# Altium PCB ARM_PCB.PcbDoc
Units mm, origin at the board's own origin, x right, y up, seen from the top; angles counter-clockwise.
Board outline 83 x 49 mm, 2 copper layers (Top Layer, Bottom Layer); 58 components, 41 nets, 250 pads, 33 vias.
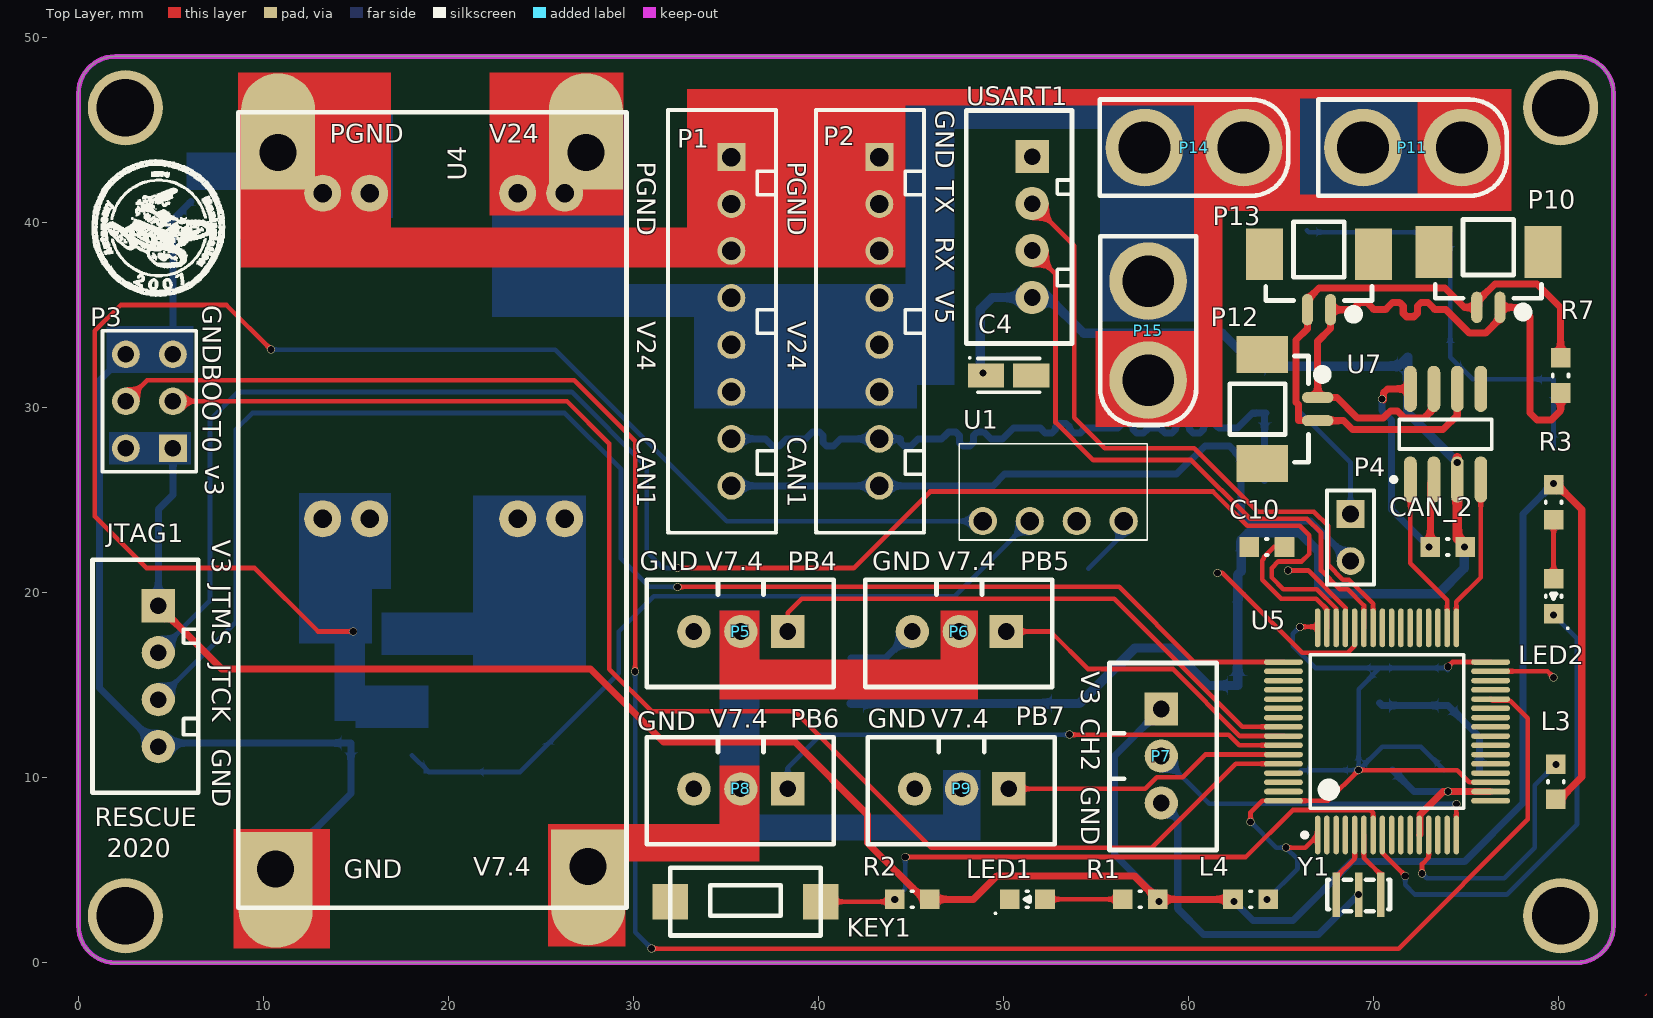
[diagram p0: Top Layer view]
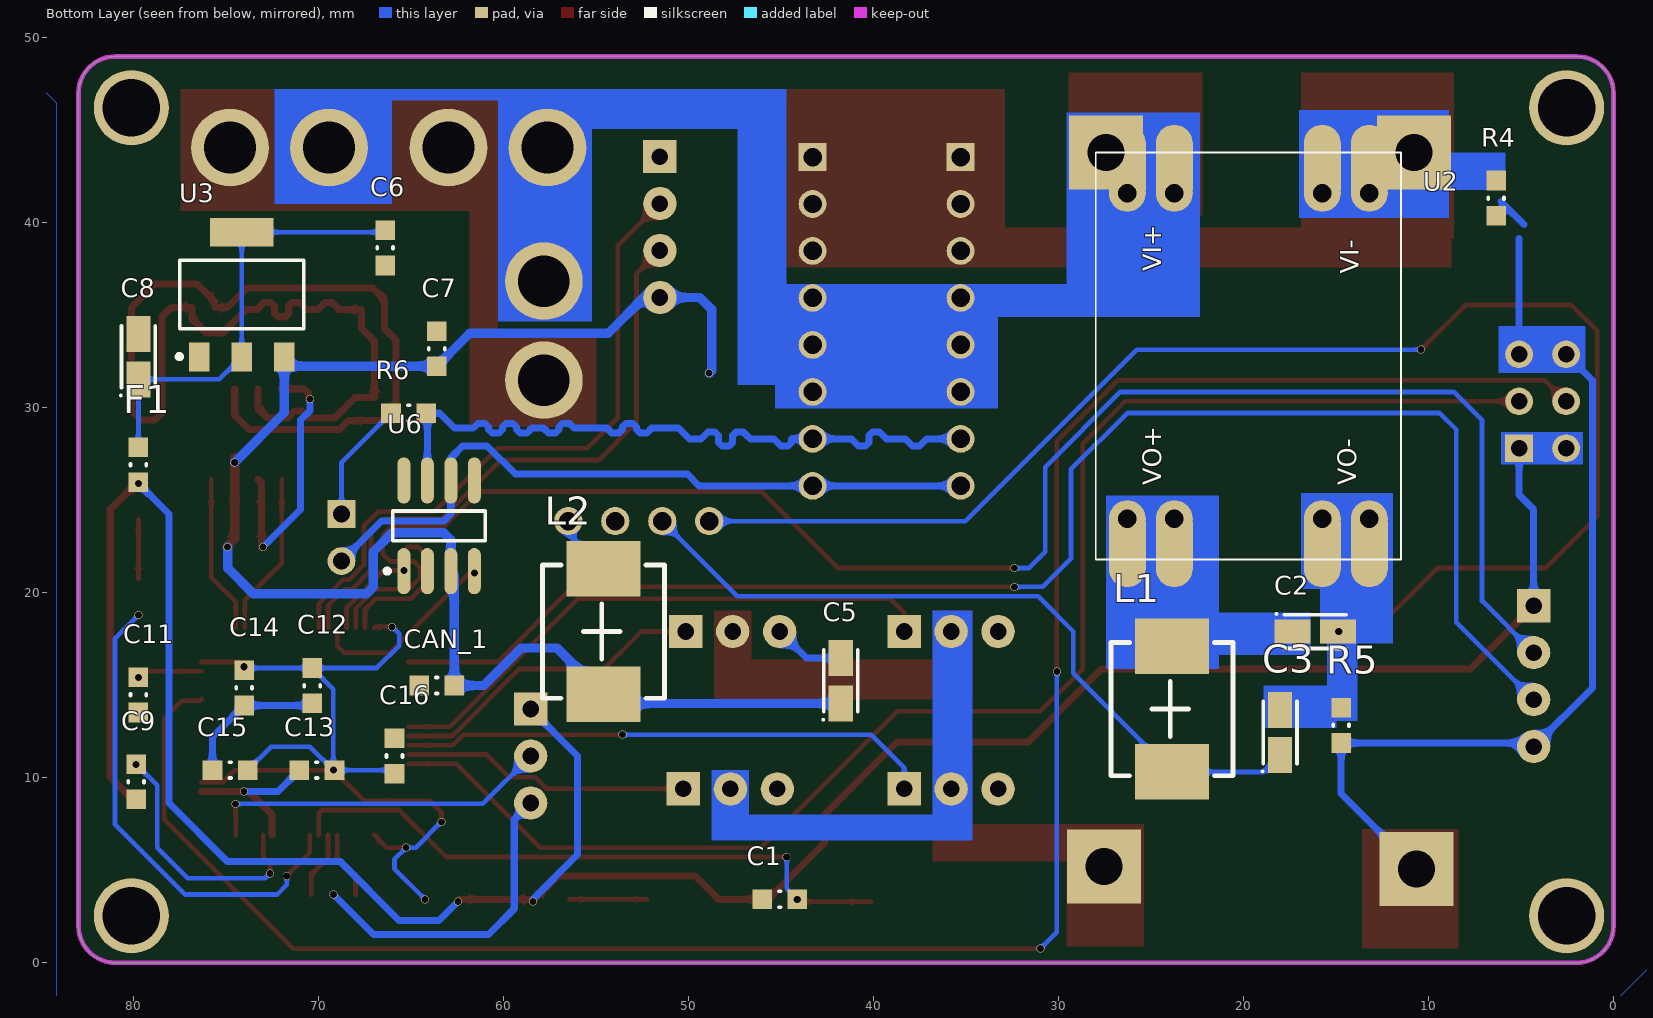
[diagram p1: Bottom Layer view, seen from below]
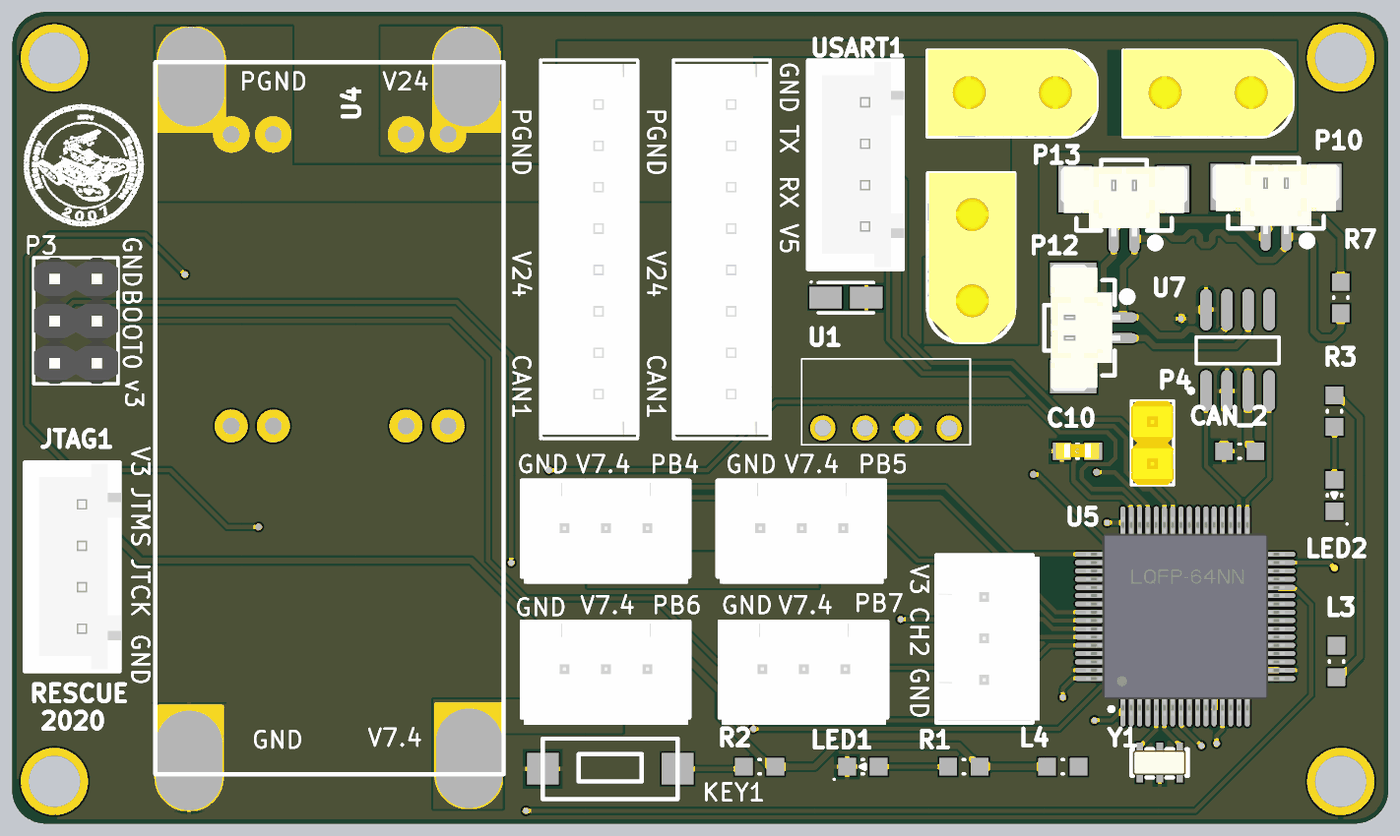
[diagram p2: 3D render of the assembled board from above, using the file's embedded part models]

## Layer stack, top to bottom
Top Solder: solder mask 0.0102, Solder Resist, Dk 3.5
Top Layer: signal copper 0.0356
Dielectric 1: dielectric 0.32, FR-4, Dk 4.8
Bottom Layer: signal copper 0.0356
Bottom Solder: solder mask 0.0102, Solder Resist, Dk 3.5

## Board outline
2,0 cw(c2,2) 0,2 0,47 cw(c2,47) 2,49 81,49 cw(c81,47) 83,47 83,2 cw(c81,2) 81,0

## Design rules (kind name [scope] priority, off if disabled: settings)
Clearance [All] p1: gap=0.127 ignorepadtopadclearanceinfootprint=TRUE
ComponentClearance [All] p1 off: gap=0.254 collisioncheckmode=3 verticalgap=0.254 showdistances=FALSE
DiffPairsRouting [All] p1: maxlimit=0.254 minlimit=0.254 mostfreqgap=0.254 toplayer_minwidth=0.381 toplayer_maxwidth=0.381 toplayer_prefwidth=0.381 bottomlayer_minwidth=0.381 bottomlayer_maxwidth=0.381 bottomlayer_prefwidth=0.381 maxuncoupledlength=12.7
Height [All] p1 off: minheight=0 maxheight=25.4 prefheight=12.7
HoleSize [All] p1 off: absolutevalues=TRUE maxlimit=2.54 minlimit=0.025 maxpercent=80.000 minpercent=20.000
MinimumSolderMaskSliver [All] p1 off: minsoldermaskwidth=0.254
PolygonConnect [All] p1: connectstyle=Relief reliefconductorwidth=0.254 reliefentries=4 polygonreliefangle="90 Angle" airgapwidth=0.254
RoutingVias [All] p1: holewidth=0.711 width=1.27 viastyle="Through Hole" minholewidth=0.711 minwidth=1.27 maxholewidth=0.711 maxwidth=1.27
SilkToSilkClearance [All] p1 off: silktosilkclearance=0.254
SilkToSolderMaskClearance [IsPad] p1 off: minsilkscreentomaskgap=0.254 clearancetoexposedcopper=TRUE
SolderMaskExpansion [All] p1: expansion=0.102
Width VCC_5 [InNet('VCC_5')] p1: maxlimit=0.762 minlimit=0.381 preferedwidth=0.762
Width PGND [InNet('PGND')] p2: maxlimit=1.27 minlimit=0.762 preferedwidth=1.27
Width GND [InNet('GND')] p3: maxlimit=0.762 minlimit=0.254 preferedwidth=0.762
Width CGND [InNet('CGND')] p4: maxlimit=0.762 minlimit=0.254 preferedwidth=0.762
Width VCC_24 [InNet('VCC_24')] p5: maxlimit=1.27 minlimit=0.889 preferedwidth=1.27
Width VCC_7.4 [InNet('VCC_7.4')] p6: maxlimit=0.762 minlimit=0.508 preferedwidth=0.762
Width VCC_3.3 [InNet('VCC_3.3')] p7: maxlimit=0.381 minlimit=0.381 preferedwidth=0.381
Width [All] p8: maxlimit=0.254 minlimit=0.254 preferedwidth=0.254
23 further rules are at their usual default settings.

## Classes and differential pairs
differential pair CAN2: +CAN2_P -CAN2_N
differential pair CAN1: +CAN1_P -CAN1_N

## Components (designator, comment, footprint, x,y, rotation, side; value= is the part's Value field where it differs from the comment)
C1 "104" C0603 45.085,3.429 r0 bottom
C2 "4.7uF" A3216 16.129,17.907 r180 bottom
C3 "4.7uF" A3216 18.034,12.446 r90 bottom
C4 "10uF" A3216 50.292,31.75 r0 top
C5 "22uF" A3216 41.783,15.24 r90 bottom
C6 "104" C0603 66.421,38.646 r270 bottom
C7 "104" C0603 63.627,33.199 r270 bottom
C8 "22uF" A3216 79.756,32.766 r90 bottom
C9 "104" C0603/1608 79.883,9.779 r270 bottom
C10 "225" C0603/1608 64.255,22.479 r0 top
C11 "225" C0603/1608 79.756,14.478 r90 bottom
C12 "104" C0603/1608 70.358,14.986 r90 bottom
C13 "104" C0603/1608 70.104,10.414 r180 bottom
C14 "104" C0603/1608 74.041,14.859 r90 bottom
C15 "104" C0603/1608 74.803,10.414 r180 bottom
C16 "104" C0603/1608 65.913,11.176 r270 bottom
CAN_1 "104" C0603 63.627,14.986 r180 bottom
CAN_2 "104" C0603 74.041,22.479 r0 top
F1 "0.5A" L0603 79.756,26.924 r270 bottom
JTAG1 "Header 4" Header1*4_XH2.54_zhi 3.302,6.35 r90 top
KEY1 "KEY2" KEY_RESET 35.941,3.429 r0 top
L1 "6.8uH" L0630 23.876,13.716 r90 bottom
L2 "6.8uH" L0630 54.61,17.907 r90 bottom
L3 "UPZ1608E101" L0603/1608 79.883,9.779 r90 top
L4 "UPZ1608E101" L0603/1608 63.373,3.429 r0 top
LED1 "LED BLUE" LED0603 51.308,3.429 r180 top
LED2 "LED RED" LED0603 79.756,19.812 r270 top
P1 "Header 8" Header1*8_XH2.54_zhi 38.1,40.259 r0 top
P2 "Header 8" Header1*8_XH2.54_zhi 46.101,40.259 r0 top
P3 "Header 3X2" BOOT 8.917,25.146 r180 top
P4 "Header 2" TM 68.906,23.495 r0 top
P5 "Header 3H" Header1*3XH2.54 35.306,13.843 r180 top
P6 "Header 3H" Header1*3XH2.54 47.117,13.843 r180 top
P7 "Header 3H" Header1*3XH2.54 62.611,10.668 r270 top
P8 "Header 3H" Header1*3XH2.54 35.306,5.334 r180 top
P9 "Header 3H" Header1*3XH2.54 47.244,5.334 r180 top
P10 "CAN-GH1.25-2P" GH1.25-2P（立式） 76.854,35.433 r0 top
P11 "Header 2" XT30_ĸ 73.898,52.07 r0 top
P12 "CAN-GH1.25-2P" GH1.25-2P（立式） 67.002,30.558 r90 top
P13 "CAN-GH1.25-2P" GH1.25-2P（立式） 67.691,35.306 r0 top
P14 "Header 2" XT30_ĸ 62.087,52.07 r0 top
P15 "Header 2" XT30_ĸ 65.84,32.401 r270 top
R1 "4.7K" R0603 57.404,3.429 r180 top
R2 "10kΩ" R0603 45.085,3.429 r0 top
R3 "4K7" R0603 79.756,24.892 r90 top
R4 "0R" R0603 6.35,41.341 r270 bottom
R5 "0R" R0603 14.732,12.827 r270 bottom
R6 "R_120" R0603 65.151,29.718 r0 bottom
R7 "R_120" R0603 80.137,31.75 r90 top
U1 "金升阳" 金升阳 52.705,23.876 r0 top
U2 "降压DM02" 降压DM02 17.59,47.027 r270 bottom
U3 "1117_WYN" SOT-223 74.168,36.122 r180 bottom
U4 "LM2596" LM2586_new 8.636,45.974 r270 top
U5 "STM32F405RGT6" LQFP64 70.751,12.506 r90 top
U6 "TJA1050" SO8_M 63.5,23.622 r90 bottom
U7 "TJA1050" SO8_M 73.914,28.575 r90 top
USART1 "Header 4" Header1*4_XH2.54_zhi 50.546,30.63 r90 top
Y1 "Crystal_Cap" XTAL-3213 69.215,3.683 r0 top

## Footprints (in the part's own frame and the unit in brackets; to place one, negate y for a bottom-side part, rotate by r counter-clockwise, add the part's x,y. Pads: shape width x height; smd on the part's side, far side on the other; paste and mask are expansions set on the pad)
A3216 [mm]
  rect 1.95x1.3 smd: 1(-1.225,0) 2(1.225,0)
  silkscreen extent -2.15,-0.91 1.68,1, body extent -1.7,-0.9 1.7,0.9, height 1.8
BOOT [mm]
  rect 1.5x1.5 hole 0.9: 1(3.81,-2.667)
  round 1.5 hole 0.9: 2(6.35,-2.667) 3(3.81,-5.207) 4(6.35,-5.207) 5(3.81,-7.747) 6(6.35,-7.747)
  silkscreen extent 2.54,-9.02 7.62,-1.4, body extent 2.54,-9.02 7.62,-1.4, height 8.38
C0603 [mm]
  rect 1.06x1.06 smd: 1(-0.95,0) 2(0.95,0)
  silkscreen extent -0.05,-0.43 0.05,0.43, body extent -0.85,-0.48 0.85,0.47, height 0.95
C0603/1608 [mm]
  rect 1.06x1.06 smd: 1(-0.95,0) 2(0.95,0)
  silkscreen extent -0.05,-0.43 0.05,0.43, body extent -1.29,-0.48 1.31,0.53, height 0.95
GH1.25-2P（立式） [mm]
  rect 2x2.8 smd: 0(-3.575,3) 0(2.325,3)
  oval 0.6x1.7 smd: 1(0,0) 2(-1.25,0)
  silkscreen extent -3.5,-0.5 2.25,4.75, body extent -4.45,0.15 3.2,4.35, height 4.7
Header1*3XH2.54 [mm]
  rect 1.8x1.8 hole 0.9: 1(-3.048,-4.064)
  round 1.8 hole 0.9: 2(-0.508,-4.064) 3(2.032,-4.064)
  silkscreen extent -5.54,-6.86 4.57,-1.06, body extent -5.46,-6.73 4.44,-0.64, height 7
Header1*4_XH2.54_zhi [mm]
  rect 1.8x1.8 hole 0.9: 1(12.954,-1.016)
  round 1.8 hole 0.9: 2(10.414,-1.016) 3(7.874,-1.016) 4(5.334,-1.016)
  silkscreen extent 2.84,-3.17 15.44,2.54, body extent 2.97,-3.26 15.37,2.49, height 7
Header1*8_XH2.54_zhi [mm]
  rect 1.5x1.5 hole 1: 1(-2.794,3.302)
  round 1.5 hole 1: 2(-2.794,0.762) 3(-2.794,-1.778) 4(-2.794,-4.318) 5(-2.794,-6.858) 6(-2.794,-9.398) 7(-2.794,-11.938) 8(-2.794,-14.478)
  silkscreen extent -6.22,-17.02 -0.38,5.84, body extent -6.13,-16.79 -0.38,5.61, height 7
KEY_RESET [mil]
  rect 75x75 smd: 1(-155,-5) 2(165,-5)
  silkscreen extent -155,-77 165,67, body extent -175,-75 185,65, height 98
L0603 [mm]
  rect 1.06x1.06 smd: 1(-0.95,0) 2(0.95,0)
  silkscreen extent -0.05,-0.43 0.05,0.43, body extent -0.85,-0.48 0.85,0.47, height 0.95
L0603/1608 [mm]
  rect 1.06x1.06 smd: 1(-0.95,0) 2(0.95,0)
  silkscreen extent -0.05,-0.43 0.05,0.43, body extent -0.9,-0.5 0.9,0.5, height 1
L0630 [mm]
  rect 3x4 smd: 1(-3.4,0) 2(3.4,0)
  silkscreen extent -3.6,-3.3 3.6,3.3, body extent -3.6,-3.3 3.6,3.3, height 3
LED0603 [mm]
  rect 1.06x1.06 smd: 1(-0.95,0) 2(0.95,0)
  silkscreen extent -0.13,-0.43 1.78,0.81, body extent -0.85,-0.48 0.85,0.47, height 0.95
LM2586_new [mm]
  oval 6x4 smd: 1(0.889,18.796) 2(0.889,2.159) 3(42.037,18.923) 4(42.164,2.032)
  rect 4x4 hole 2: 1(2.159,18.796) 2(2.159,2.159) 3(40.767,18.923) 4(40.894,2.032)
  silkscreen extent 0,0 43,21, body extent 0,0 42.8,20.96, height 1.6
LQFP64 [mm]
  oval 2.1x0.3 smd: 1(-5.6,3.75) 2(-5.6,3.25) 3(-5.6,2.75) 4(-5.6,2.25) 5(-5.6,1.75) 6(-5.6,1.25) 7(-5.6,0.75) 8(-5.6,0.25) 9(-5.6,-0.25) 10(-5.6,-0.75) 11(-5.6,-1.25) 12(-5.6,-1.75) 13(-5.6,-2.25) 14(-5.6,-2.75) 15(-5.6,-3.25) 16(-5.6,-3.75) 33(5.6,-3.75) 34(5.6,-3.25) 35(5.6,-2.75) 36(5.6,-2.25) 37(5.6,-1.75) 38(5.6,-1.25) 39(5.6,-0.75) 40(5.6,-0.25) 41(5.6,0.25) 42(5.6,0.75) 43(5.6,1.25) 44(5.6,1.75) 45(5.6,2.25) 46(5.6,2.75) 47(5.6,3.25) 48(5.6,3.75)
  oval 0.3x2.1 smd: 17(-3.75,-5.6) 18(-3.25,-5.6) 19(-2.75,-5.6) 20(-2.25,-5.6) 21(-1.75,-5.6) 22(-1.25,-5.6) 23(-0.75,-5.6) 24(-0.25,-5.6) 25(0.25,-5.6) 26(0.75,-5.6) 27(1.25,-5.6) 28(1.75,-5.6) 29(2.25,-5.6) 30(2.75,-5.6) 31(3.25,-5.6) 32(3.75,-5.6) 49(3.75,5.6) 50(3.25,5.6) 51(2.75,5.6) 52(2.25,5.6) 53(1.75,5.6) 54(1.25,5.6) 55(0.75,5.6) 56(0.25,5.6) 57(-0.25,5.6) 58(-0.75,5.6) 59(-1.25,5.6) 60(-1.75,5.6) 61(-2.25,5.6) 62(-2.75,5.6) 63(-3.25,5.6) 64(-3.75,5.6)
  silkscreen extent -5.72,-4.15 4.15,4.57, body extent -6,-6 6,6, height 1.6
R0603 [mm]
  rect 1.06x1.06 smd: 1(-0.95,0) 2(0.95,0)
  silkscreen extent -0.05,-0.43 0.05,0.43, body extent -0.85,-0.48 0.85,0.47, height 0.95
SO8_M [mm]
  oval 2.5x0.7 smd: 1(-2.45,1.905) 2(-2.45,0.635) 3(-2.45,-0.635) 4(-2.45,-1.905) 5(2.45,-1.905) 6(2.45,-0.635) 7(2.45,0.635) 8(2.45,1.905)
  silkscreen extent -2.57,-2.5 0.8,2.93, body extent -2,-2.5 2,2.5, height 1.75
SOT-223 [mm]
  rect 1.1x1.55 smd: 1(-2.3,-3.375) 2(0,-3.375) 3(2.3,-3.375)
  rect 3.45x1.55 smd: 4(0,3.375)
  silkscreen extent -3.5,-3.48 3.35,1.85, body extent -3.3,-3.94 3.3,3.43, height 0.8
TM [mm]
  rect 1.5x1.5 hole 0.9: 1(-0.127,0.762)
  round 1.5 hole 0.9: 2(-0.127,-1.778)
  silkscreen extent -1.4,-3.05 1.14,2.03, body extent -1.4,-3.05 1.14,2.03, height 9.5
XT30_ĸ [mm]
  round 4.2 hole 2.8: 1(-4.445,-8.001) 2(0.905,-8.001)
  silkscreen extent -6.87,-10.6 3.33,-5.4, body extent -6.96,-10.63 3.44,-5.33, height 12.6
XTAL-3213 [mm]
  rect 0.4x2.4 smd: 1(-1.2,0) 2(0,0) 3(1.2,0)
  silkscreen extent -1.7,-0.9 1.7,0.8, body extent -1.63,-0.76 1.57,0.74, height 0.8
金升阳 [mil]
  round 60 hole 39.37: 1(-150,0) 2(-50,0) 3(50,0) 4(150,0)
  silkscreen extent -200,-40 200,165
降压DM02 [mm]
  oval 4.5x2 smd: 1(3.974,-8.699) 1(3.974,-6.159) 2(3.974,1.841) 2(3.974,4.381) 3(24.474,-8.699) 3(24.474,-6.159) 4(24.474,1.841) 4(24.474,4.381)
  round 2 hole 1: 1(5.424,-8.699) 1(5.424,-6.159) 2(5.424,1.841) 2(5.424,4.381) 3(23.024,-8.699) 3(23.024,-6.159) 4(23.024,1.841) 4(23.024,4.381)
  silkscreen extent 3.22,-10.41 25.22,6.09, body extent 3.3,-10.29 25.15,6.1, height 4.5

## Part data
C1 C6 CAN_1 CAN_2: library part CAP_WYN
C2 C3 C4 C5 C8: library part CAP_POL_WYN
C7: library part Cap
C9 C10 C11 C12 C13 C14 C15 C16: library part 陶瓷电容, "陶瓷电容"
F1: library part FUSE
JTAG1 USART1: "Header, 4-Pin", LatestRevisionDate=17-Jul-2002, LatestRevisionNote="Re-released for DXP Platform.", Publisher="Altium Limited"
KEY1: library part KEY
L1 L2 L3 L4: library part 磁珠, "贴片磁珠"
LED1: library part LED, Color=BLUE
LED2: library part LED, Color=RED
P1 P2: "Header, 8-Pin", LatestRevisionDate=17-Jul-2002, LatestRevisionNote="Re-released for DXP Platform.", Publisher="Altium Limited"
P3: "Header, 3-Pin, Dual row", LatestRevisionDate=17-Jul-2002, LatestRevisionNote="Re-released for DXP Platform.", Publisher="Altium Limited"
P10 P12 P13: "CAN-GH1.25-2P端子座"
R1 R6 R7: library part R
R2: library part RES_WYN
R3 R4 R5: library part Resistor
U4: library part DC-DC稳压模块, "云辉 LM2596S DC-DC降压电源模块"
U5: "微控制器STM32F405RGT6"
Y1: LatestRevisionDate=17-Jul-2002, LatestRevisionNote="Re-released for DXP Platform.", Published=8-Jun-2000, Publisher="Altium Limited"

## Free pads (board coordinates)
  round 4.064 hole 3.1: 1(2.54,46.228) 2(2.54,2.54) 3(80.137,2.54) 4(80.137,46.228)

## Via types
v1: diameter 0.432, hole 0.381, Top Layer to Bottom Layer, 33 vias

## Nets (pads, with @x,y where several pads share a name; then routed paths per layer and width w, separated by ;. In a path a pad name is that pad's centre, name@x,y a point inside that pad or via, vN(x,y) a via of type N, cw(c..) or ccw(c..) an arc to the next point about the centre after c; other vN are vias at no path point)
ADC_CH2: P7.2 U5.16 | length 18.7
  Top Layer w0.254: U5.16 v1(74.501,8.588)
  Bottom Layer w0.254: P7.2 61.135,8.588 v1(74.501,8.588)
BOOT0: P3.3 U5.60 | length 79.1
  Top Layer w0.254: P3.3 26.416,30.353 28.702,28.067 28.702,15.875 30.988,13.589 38.735,13.589 46.101,6.223 58.039,6.223 62.572,10.756 U5.60
BOOT1: P3.4 U5.28 | length 115.3
  Top Layer w0.254: P3.4 3.71,31.496 26.797,31.496 30.099,28.194 v1(30.099,15.748) ; v1(30.988,0.762) 71.374,0.762 78.359,7.747 78.359,13.219 77.418,14.16 76.447,14.16 U5.28
  Bottom Layer w0.254: v1(30.099,15.748) 30.099,1.651 v1(30.988,0.762)
CAN1_N: P1.8 P2.8 P4.2 U6.6 | length 38.7
  Bottom Layer w0.381: P1.8 P2.8 49.44,25.781 50.075,26.416 59.377,26.416 60.901,27.94 62.23,27.94 62.865,27.305 U6.6 62.865,24.257 63.246,23.876 66.62,23.876 P4.2
CAN1_P: P1.7 P2.7 R6.1 U6.7 | length 38.5
  Bottom Layer w0.381: P1.7 35.941,28.321 37.148,28.321 37.338,28.13 37.529,27.94 37.91,27.94 38.1,28.13 38.291,28.321 38.481,28.321 39.306,28.321 39.497,28.511 39.688,28.702 40.069,28.702 40.259,28.511 40.259,28.321 40.259,28.13 40.45,27.94 40.831,27.94 41.021,28.13 41.212,28.321 41.402,28.321 P2.7 44.45,28.321 44.45,28.13 44.64,27.94 45.021,27.94 45.212,28.13 45.402,28.321 45.593,28.321 46.482,28.321 46.672,28.321 46.863,28.511 47.053,28.702 47.434,28.702 47.625,28.511 47.625,28.321 47.625,28.13 47.816,27.94 48.197,27.94 48.387,28.13 48.387,28.321 48.387,28.511 48.578,28.702 48.959,28.702 49.149,28.511 49.34,28.321 49.53,28.321 49.967,28.321 50.55,28.904 51.689,28.904 52.006,28.904 52.07,28.84 52.261,28.65 52.642,28.65 52.832,28.84 52.832,28.904 52.832,28.967 53.023,29.158 53.404,29.158 53.594,28.967 53.594,28.904 53.594,28.84 53.785,28.65 54.165,28.65 54.356,28.84 54.419,28.904 54.737,28.904 55.88,28.904 56.197,28.904 56.261,28.967 56.451,29.158 56.832,29.158 57.023,28.967 57.023,28.904 57.023,28.84 57.213,28.65 57.594,28.65 57.785,28.84 57.848,28.904 58.483,28.904 58.547,28.84 58.737,28.65 59.118,28.65 59.309,28.84 59.309,28.904 59.309,28.967 59.499,29.158 59.88,29.158 60.071,28.967 60.071,28.904 60.071,28.84 60.261,28.65 60.642,28.65 60.833,28.84 60.833,28.904 60.833,28.967 61.023,29.158 61.404,29.158 61.595,28.967 61.658,28.904 61.722,28.904 62.666,28.904 63.481,29.718 R6.1 64.135,29.652 U6.7
CAN1_RX: U5.44 U6.4 | length 10.3
  Top Layer w0.254: v1(61.595,21.082) 61.849,21.082 66.167,16.764 68.63,16.764 69.001,17.135 U5.44
CAN1_TX: U5.45 U6.1 | length 5
  Top Layer w0.254: v1(65.405,21.209) 66.483,21.209 68.501,19.191 U5.45
CAN2_N: P10.2 P12.2 P13.2 R7.2 U7.6 | length 35.7
  Top Layer w0.381: U7.6 74.549,29.585 73.787,28.823 68.88,28.823 68.395,29.308 P12.2 65.962,29.308 65.962,30.175 65.835,30.302 65.835,33.659 66.441,34.266 P13.2 66.441,35.834 67.081,36.474 73.889,36.474 74.93,35.433 P10.2 75.604,35.726 76.581,36.703 78.867,36.703 80.137,35.433 R7.2
CAN2_P: P10.1 P12.1 P13.1 R7.1 U7.7 | length 35.7
  Top Layer w0.381: U7.7 73.279,29.972 72.765,29.458 72.39,29.458 72.263,29.458 71.691,29.458 71.501,29.648 71.31,29.839 70.929,29.839 70.739,29.648 70.549,29.458 70.358,29.458 69.143,29.458 68.043,30.558 P12.1 67.002,33.601 67.691,34.29 P13.1 68.707,35.306 68.897,35.306 69.088,35.496 69.278,35.687 69.659,35.687 69.85,35.496 70.04,35.306 70.485,35.306 70.675,35.306 70.866,35.496 71.056,35.687 71.438,35.687 71.628,35.496 71.628,35.306 71.628,35.115 71.819,34.925 72.2,34.925 72.39,35.115 72.39,35.306 72.39,35.496 72.581,35.687 72.962,35.687 73.152,35.496 73.343,35.306 73.914,35.306 73.946,35.306 75.216,34.036 76.073,34.036 76.854,34.817 P10.1 77.978,35.433 78.486,34.925 78.486,29.718 78.867,29.337 79.629,29.337 80.137,29.845 R7.1
CAN2_RX: U5.33 U7.4 | length 8.6
  Top Layer w0.254: U5.33 74.501,19.51 75.819,20.828 U7.4
CAN2_TX: U5.34 U7.1 | length 8.8
  Top Layer w0.254: U7.1 72.009,21.59 74.001,19.598 U5.34
CGND: C2.2 C3.2 R5.1 U1.1 U2.4 | length 80
  Top Layer w0.254: v1(10.414,33.147) 8.001,35.56 2.286,35.56 0.889,34.163 0.889,24.13 3.683,21.336 9.525,21.336 12.954,17.907 v1(14.859,17.907)
  Bottom Layer w0.254: v1(10.414,33.147) 25.781,33.147 35.052,23.876 U1.1
GND: C1.2 C4.2 C5.2 C6.2 C7.1 C8.2 C9.2 C10.1 C11.1 C12.1 C13.1 C14.1 C15.1 C16.1 CAN_1.1 CAN_2.1 JTAG1.4 KEY1.1 LED1.2 P3.5 P3.6 P5.3 P6.3 P7.3 P8.3 P9.3 R4.2 R5.2 U1.3 U3.1 U4.4 U5.12 U5.18 U5.63 U6.2 U6.8 U7.2 U7.8 USART1.1 Y1.2 | length 102.9
  Top Layer w0.381: v1@70.549,30.416 70.549,30.797 70.776,31.025 U7.8 ; U5.12 72.533,6.939 72.533,8 73.79,9.256 v1(74.041,9.256) U5.18 ; CAN_2.1 73.091,25.937 U7.2
  Bottom Layer w0.381: P3.6 1.143,31.469 1.143,14.859 JTAG1.4 4.511,11.877 R5.2 14.732,9.144 U4.4@10.668,5.08 ; 4.853,39.91 6.096,41.153 ; P3.5 5.107,39.148 ; C5.2 43.643,16.465 P6.3 ; P7.3 59.436,7.747 59.436,2.921 60.833,1.524 67.056,1.524 v1(69.215,3.683) ; C12.1 70.485,13.909 C14.1 75.753,12.197 C15.1 ; v1(70.485,30.48) 70.485,29.845 70.993,29.337 70.993,24.511 v1(73.025,22.479) ; C13.1 72.212,9.256 v1(74.041,9.256)
JTCK: JTAG1.3 U5.49 | length 81.8
  Top Layer w0.254: v1(32.385,20.32) 56.261,20.32 60.325,16.256 U5.49
  Bottom Layer w0.254: JTAG1.3 8.509,18.415 8.509,28.829 9.398,29.718 26.289,29.718 29.337,26.67 29.337,21.844 30.861,20.32 v1(32.385,20.32)
JTMS: JTAG1.2 U5.46 | length 92.2
  Top Layer w0.254: v1(32.385,21.336) 41.91,21.336 46.046,25.472 61.342,25.472 63.191,23.622 66.04,23.622 66.548,23.114 66.548,22.098 66.145,21.695 64.875,21.695 64.516,21.336 64.516,20.828 65.151,20.193 66.96,20.193 68.001,19.152 U5.46
  Bottom Layer w0.254: JTAG1.2 7.112,19.558 7.112,29.337 8.636,30.861 26.67,30.861 30.734,26.797 30.734,22.225 31.623,21.336 v1(32.385,21.336)
NetC3_1: C3.1 L1.1 U1.2 | length 40.7
  Bottom Layer w0.254: C3.1 18.939,10.316 L1.1 29.21,15.65 29.21,17.907 31.115,19.812 47.371,19.812 U1.2
NetC6_1: C6.1 C8.1 F1.1 U3.2 U3.4 | length 24.3
  Bottom Layer w0.254: C6.1 66.52,39.497 U3.4 U3.2 75.374,31.541 C8.1 F1.1
NetC9_1: C9.1 L3.2 U5.13 | length 14.1
  Top Layer w0.254: v1(72.644,4.826) 72.644,5.334 73.001,5.691 U5.13
  Bottom Layer w0.254: v1(72.644,4.826) 72.898,4.572 77.089,4.572 78.74,6.223 78.74,9.586 v1(79.883,10.729)
NetC10_2: C10.2 U5.47 | length 7.8
  Top Layer w0.254: C10.2 64.643,22.479 64.089,21.925 64.089,21.844 64.008,21.763 64.008,20.701 65.024,19.685 66.929,19.685 67.501,19.113 U5.47
NetC11_2: C11.2 U5.31 | length 3.5
  Top Layer w0.254: U5.31 79.428,15.756 v1(79.756,15.428)
NetC12_2: C12.2 C13.2 C14.2 C15.2 C16.2 L4.2 U5.1 U5.19 U5.32 U5.48 U5.64 | length 51.5
  Top Layer w0.254: v1(63.373,7.62) 63.373,8.128 64.001,8.756 U5.64 67.557,8.756 v1(69.215,10.414) 74.549,10.414 75.207,9.756 U5.19 ; v1(65.278,6.223) 66.318,6.223 U5.1 ; v1(66.04,18.161) 66.946,18.161 U5.48 ; v1(74.041,16.002) 74.295,16.256 U5.32
  Bottom Layer w0.254: v1(63.373,7.62) 64.77,6.223 v1(65.278,6.223) 65.913,5.588 65.913,5.08 v1(64.262,3.429) ; C16.2 66.101,10.414 C13.2 v1(69.215,10.414) ; v1(66.04,18.161) 65.659,17.78 65.659,17.145 66.868,15.936 C12.2 ; C15.2 72.583,11.684 70.485,11.684 v1(69.215,10.414) ; C14.2 73.914,15.936 C12.2 ; v1(69.215,10.414) 69.215,14.793 C12.2
NetL2_2: L2.2 U1.4 | length 3.4
  Bottom Layer w0.254: L2.2 56.515,23.212 U1.4
NetLED1_1: LED1.1 R1.2 | length 4.2
  Top Layer w0.254: LED1.1 R1.2
NetLED2_1: LED2.1 R3.1 | length 3.2
  Top Layer w0.254: LED2.1 R3.1
NetP4_1: P4.1 R6.2 | length 6.6
  Bottom Layer w0.254: R6.2 68.779,27.04 P4.1
OSC_IN: U5.5 Y1.1 | length 3.6
  Top Layer w0.254: Y1.1 68.015,4.642 69.001,5.628 U5.5
OSC_OUT: U5.6 Y1.3 | length 3.6
  Top Layer w0.254: U5.6 69.501,5.683 70.415,4.769 Y1.3
PB4: P5.1 U5.56 | length 31
  Top Layer w0.254: P5.1 38.354,18.923 39.116,19.685 56.007,19.685 62.936,12.756 U5.56
PB5: P6.1 U5.57 | length 17.3
  Top Layer w0.254: P6.1 52.556,17.907 54.588,15.875 59.182,15.875 62.801,12.256 U5.57
PB6: P8.1 U5.58 | length 28.9
  Top Layer w0.254: v1(53.594,12.33) 62.188,12.33 62.762,11.756 U5.58
  Bottom Layer w0.254: P8.1 38.354,10.541 40.143,12.33 v1(53.594,12.33)
PB7: P9.1 U5.59 | length 15.6
  Top Layer w0.254: P9.1 57.677,9.398 58.301,10.022 59.701,10.022 60.935,11.256 U5.59
PC0: LED2.2 U5.8 | length 26.1
  Top Layer w0.254: U5.8 70.501,5.935 v1(71.737,4.699)
  Bottom Layer w0.254: v1(71.737,4.699) 71.737,4.209 72.263,3.683 77.216,3.683 81.026,7.493 81.026,17.526 v1(79.756,18.796)
PGND: P1.1 P1.2 P1.3 P2.1 P2.2 P2.3 P11.2 P14.2 P15.2 R4.1 U2.2 U4.2
RESET: C1.1 KEY1.2 R2.1 U5.7 | length 34.2
  Top Layer w0.254: KEY1.2 44.008,3.302 v1(44.135,3.429) ; v1(44.704,5.715) 63.119,5.715 65.659,8.255 69.85,8.255 70.001,8.104 U5.7
  Bottom Layer w0.254: v1(44.135,3.429) 44.704,3.998 v1(44.704,5.715)
U1_RX: U5.43 USART1.3 | length 33
  Top Layer w0.254: USART1.3 52.832,37.234 52.832,29.21 54.864,27.178 60.174,27.178 63.349,24.003 66.421,24.003 67.183,23.241 67.183,21.209 68.199,20.193 68.622,20.193 69.501,19.314 U5.43
U1_TX: U5.42 USART1.2 | length 35.4
  Top Layer w0.254: USART1.2 53.848,38.758 53.848,29.464 55.499,27.813 60.325,27.813 63.754,24.384 66.802,24.384 67.564,23.622 67.564,21.512 68.363,20.713 68.695,20.713 70.001,19.407 U5.42
VCC_3.3: F1.2 JTAG1.1 L3.1 L4.1 P3.1 P3.2 P7.1 R1.1 R2.2 R3.2 | length 143
  Top Layer w0.381: JTAG1.1 7.747,15.875 27.686,15.875 31.623,11.938 38.735,11.938 42.672,8.001 42.672,6.477 45.72,3.429 R2.2 48.387,3.429 49.657,4.699 57.084,4.699 R1.1 L4.1 ; R3.2 79.949,25.842 81.28,24.511 81.28,10.033 80.076,8.829 L3.1
  Bottom Layer w0.381: JTAG1.1 4.318,24.511 5.107,25.3 P3.1 ; v1(58.42,3.302) 58.42,3.429 56.007,5.842 56.007,11.176 P7.1 ; v1(62.484,3.302) 63.5,2.286 65.659,2.286 68.834,5.461 74.93,5.461 78.105,8.636 78.105,24.257 v1(79.756,25.908)
VCC_5: C4.1 C5.1 C7.2 CAN_1.2 CAN_2.2 L2.1 U3.3 U6.3 U7.3 USART1.4 | length 87.8
  Top Layer w0.508: U7.3@74.549,27.305 v1(74.549,27.051) U7.3 74.549,22.921 CAN_2.2
  Bottom Layer w0.508: C5.1 54.118,14.015 L2.1 57.121,17.018 59.055,17.018 61.087,14.986 CAN_1.2 62.677,20.984 U6.3 62.865,22.86 63.246,23.241 66.04,23.241 67.056,22.225 67.056,20.32 67.437,19.939 73.533,19.939 74.93,21.336 v1(74.93,22.479) ; v1(48.895,31.877) 48.768,32.004 48.768,35.329 49.403,35.964 USART1.4 52.428,35.964 54.356,34.036 61.84,34.036 C7.2 71.37,32.249 U3.3 71.868,29.732 v1(74.549,27.051)
VCC_5O: C2.1 L1.2 U2.3
VCC_7.4: P5.2 P6.2 P8.2 P9.2 U4.3
VCC_24: P1.4 P1.5 P1.6 P2.4 P2.5 P2.6 P11.1 P14.1 P15.1 U2.1 U4.1
pads on no net: P10.0 P12.0 P13.0 U5.2 U5.3 U5.4 U5.9 U5.10 U5.11 U5.14 U5.15 U5.17 U5.20 U5.21 U5.22 U5.23 U5.24 U5.25 U5.26 U5.27 U5.29 U5.30 U5.35 U5.36 U5.37 U5.38 U5.39 U5.40 U5.41 U5.50 U5.51 U5.52 U5.53 U5.54 U5.55 U5.61 U5.62 U6.5 U7.5

## Polygon pours and split planes (outlines as drawn)
GND on Top Layer "Top Layer-No Net" (solid, remove dead copper, shelved, pour order 48): -3.81,51.181 -3.556,51.435 86.36,51.435 86.36,-0.127 81.28,-5.207 77.978,-1.905 -4.572,-1.905
GND on Bottom Layer "Top Layer-No Net" (solid, remove dead copper, shelved, pour order 50): -2.413,52.705 85.344,52.705 87.884,50.165 84.201,46.482 84.201,-8.128 5.969,-8.128 -2.032,-0.127

## Keep-outs
Keep-Out Layer:
  the board outline again, w0.254

## Other copper
Top Layer:
  rectangle net PGND: 32.893,37.592 44.704,46.355
  rectangle net PGND: 54.991,28.956 61.849,34.163
  rectangle net PGND: 60.325,32.639 61.849,46.99
  rectangle net PGND: 60.579,40.64 66.04,47.117
  rectangle net PGND: 65.278,40.64 77.47,41.529
  rectangle net PGND: 72.39,41.275 77.47,46.99
  rectangle net PGND: 59.055,46.736 77.47,47.244
  rectangle net PGND: 32.893,46.355 60.452,47.244
  rectangle net PGND: 32.893,44.958 44.704,46.863
  rectangle net PGND: 8.636,40.386 16.891,48.133
  rectangle net VCC_24: 22.225,40.386 29.464,48.133
  region net VCC_7.4: 48.641,19.05 46.609,19.05 46.609,14.224 48.641,14.224
  region net VCC_7.4: 47.625,16.383 34.671,16.383 34.671,14.224 47.625,14.224
  region net VCC_7.4: 36.83,19.05 34.671,19.05 34.671,15.748 36.83,15.748
  region net VCC_7.4: 29.591,7.493 25.4,7.493 25.4,0.889 29.591,0.889
  region net VCC_7.4: 36.83,7.493 25.654,7.493 25.654,5.461 36.83,5.461
  region net VCC_7.4: 36.83,10.668 34.671,10.668 34.671,6.35 36.83,6.35
  region net PGND: 33.147,39.751 8.763,39.751 8.763,37.592 33.147,37.592
  region net PGND: 16.891,40.64 8.636,40.64 8.636,39.116 16.891,39.116
  region net GND: 13.589,7.239 8.382,7.239 8.382,0.762 13.589,0.762
Bottom Layer:
  region net CGND: 15.875,22.225 11.938,22.225 11.938,17.272 15.875,17.272
  rectangle net VCC_24: 44.704,31.242 47.371,45.466
  rectangle net VCC_24: 33.274,29.972 44.45,36.703
  rectangle net VCC_3.3: 1.651,26.924 6.096,28.702
  rectangle net GND: 1.524,31.877 6.223,34.417
  rectangle net VCC_24: 55.245,34.671 60.325,47.117
  rectangle net VCC_24: 66.04,41.021 72.39,47.244
  rectangle net VCC_24: 55.118,46.609 66.675,47.244
  rectangle net VCC_24: 44.704,45.085 55.753,47.244
  rectangle net VCC_5O: 21.336,15.875 27.432,25.273
  rectangle net VCC_5O: 16.383,16.637 21.717,18.923
  rectangle net CGND: 13.843,13.081 15.494,18.669
  rectangle net CGND: 14.986,12.7 18.923,14.986
  region net VCC_24: 35.179,36.703 22.352,36.703 22.352,34.925 35.179,34.925
  region net VCC_24: 29.591,45.974 22.352,45.974 22.352,35.941 29.591,35.941
  region net PGND: 17.018,46.101 8.89,46.101 8.89,40.259 17.018,40.259
  region net PGND: 10.795,43.815 5.842,43.815 5.842,41.783 10.795,41.783
  region net CGND: 16.891,25.4 11.938,25.4 11.938,20.193 16.891,20.193
  region net VCC_7.4: 48.768,10.414 46.736,10.414 46.736,6.604 48.768,6.604
  region net VCC_7.4: 48.133,8.001 34.671,8.001 34.671,6.604 48.133,6.604
  region net VCC_7.4: 36.83,19.05 34.671,19.05 34.671,7.747 36.83,7.747
  rectangle net VCC_24: 43.053,29.972 45.339,36.703
  rectangle net CGND: 12.065,20.193 16.891,25.146

## Silkscreen, mask and mechanical layers (free items; w line width, h text height)
Top Overlay:
  drawing of 2360 lines, arcs and shapes, not listed
  text "GND" at 46.355,46.101 h1.02 r270
  text "PGND" at 13.589,44.323 h1.02
  text "V24" at 22.225,44.323 h1.02
  text "PGND" at 30.226,43.307 h1.02 r270
  text "PGND" at 30.226,43.307 h1.02 r270
  text "PGND" at 38.354,43.307 h1.02 r270
  text "TX" at 46.355,42.291 h1.02 r270
  text "RX" at 46.355,39.243 h1.02 r270
  text "V5" at 46.355,36.322 h1.02 r270
  text "GND" at 6.731,35.56 h1.02 r270
  text "V24" at 30.226,34.671 h1.02 r270
  text "V24" at 38.354,34.671 h1.02 r270
  text "BOOT0" at 6.731,32.385 h1.02 r270
  text "CAN1" at 30.226,28.448 h1.02 r270
  text "CAN1" at 38.354,28.448 h1.02 r270
  text "v3" at 6.858,26.924 h1.02 r270
  text "V3" at 7.239,22.86 h1.02 r270
  text "GND" at 30.353,21.209 h1.02
  text "V7.4" at 33.909,21.209 h1.02
  text "PB4" at 38.354,21.209 h1.02
  text "GND" at 42.926,21.209 h1.02
  text "V7.4" at 46.482,21.209 h1.02
  text "PB5" at 50.927,21.209 h1.02
  text "JTMS" at 7.239,20.447 h1.02 r270
  text "JTCK" at 7.239,16.129 h1.02 r270
  text "V3" at 54.229,15.748 h1.02 r270
  text "CH2" at 54.229,13.208 h1.02 r270
  text "PB7" at 50.673,12.827 h1.02
  text "V7.4" at 34.163,12.7 h1.02
  text "PB6" at 38.481,12.7 h1.02
  text "GND" at 42.672,12.7 h1.02
  text "V7.4" at 46.101,12.7 h1.02
  text "GND" at 30.226,12.573 h1.02
  text "GND" at 7.239,11.557 h1.02 r270
  text "GND" at 54.229,9.525 h1.02 r270
  text "RESCUE" at 0.889,7.366 h1.02
  text "2020" at 1.524,5.715 h1.02
  text "V7.4" at 21.336,4.699 h1.02
  text "GND" at 14.351,4.572 h1.02

## Text inside footprints (layer, text, board x,y; h text height)
U2: Bottom Overlay "VO+" at 24.448,25.818 h1.02 r270; Bottom Overlay "VI+" at 24.448,37.375 h1.02 r270; Bottom Overlay "VI-" at 13.78,37.248 h1.02 r270; Bottom Overlay "VO-" at 13.907,25.818 h1.02 r270